# Altium PCB AdapterBoard.PcbDoc
Units mm, origin at the board's own origin, x right, y up, seen from the top; angles counter-clockwise.
Board outline 30.99 x 32.26 mm, 4 copper layers (Top Layer, Layer 1, Layer 2, Bottom Layer), stack 0.603 mm thick; 3 components, 26 nets, 84 pads, 92 vias.
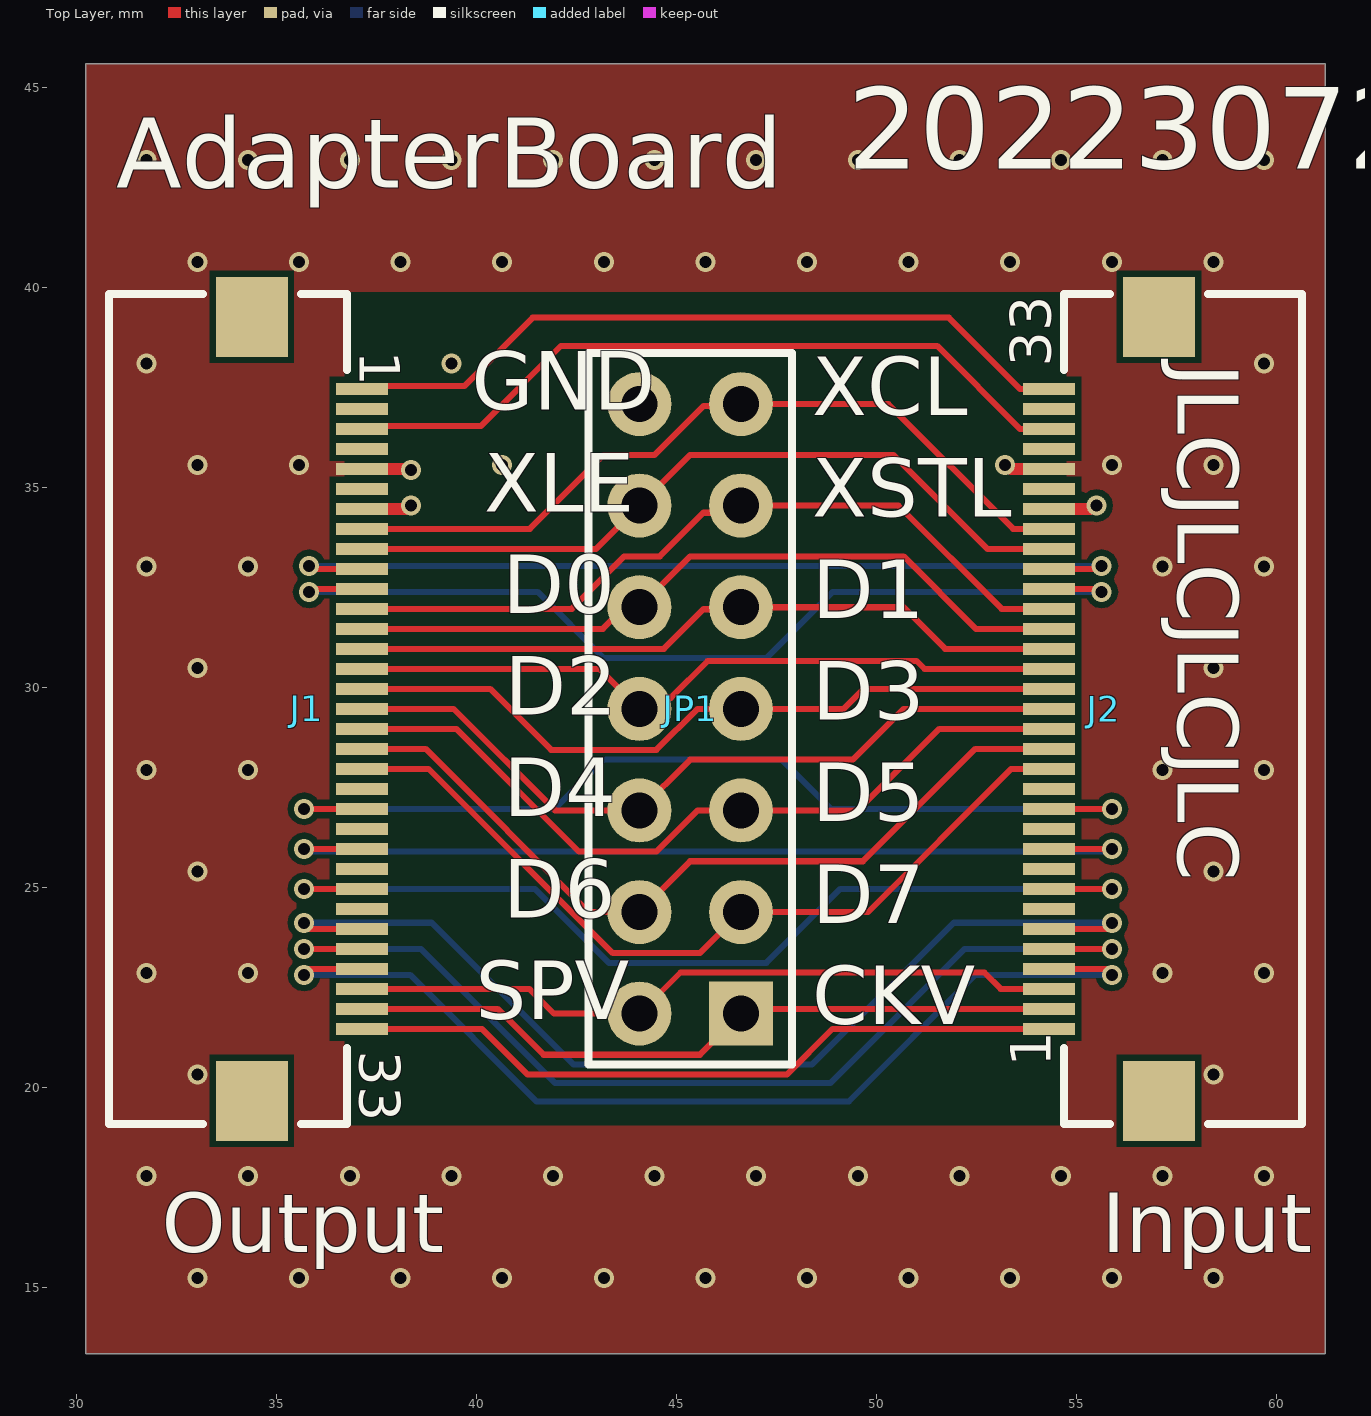
[diagram p0: Top Layer view]
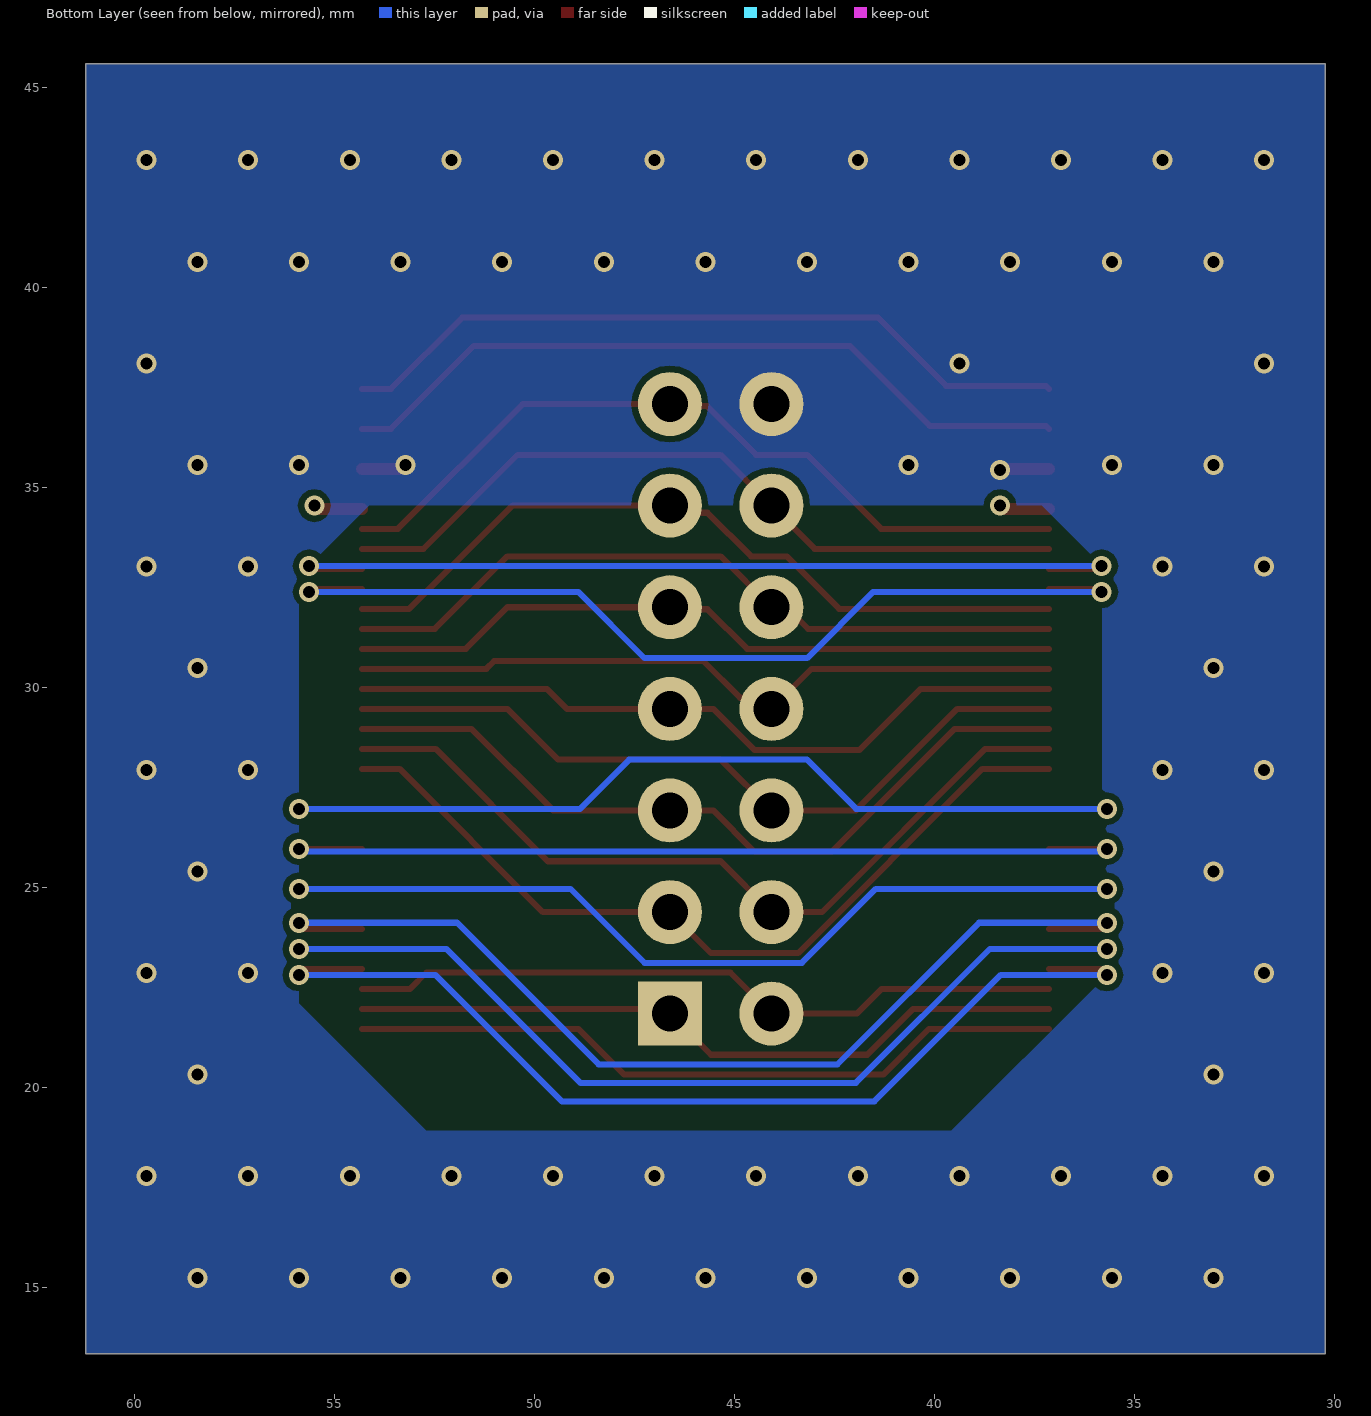
[diagram p1: Bottom Layer view, seen from below]
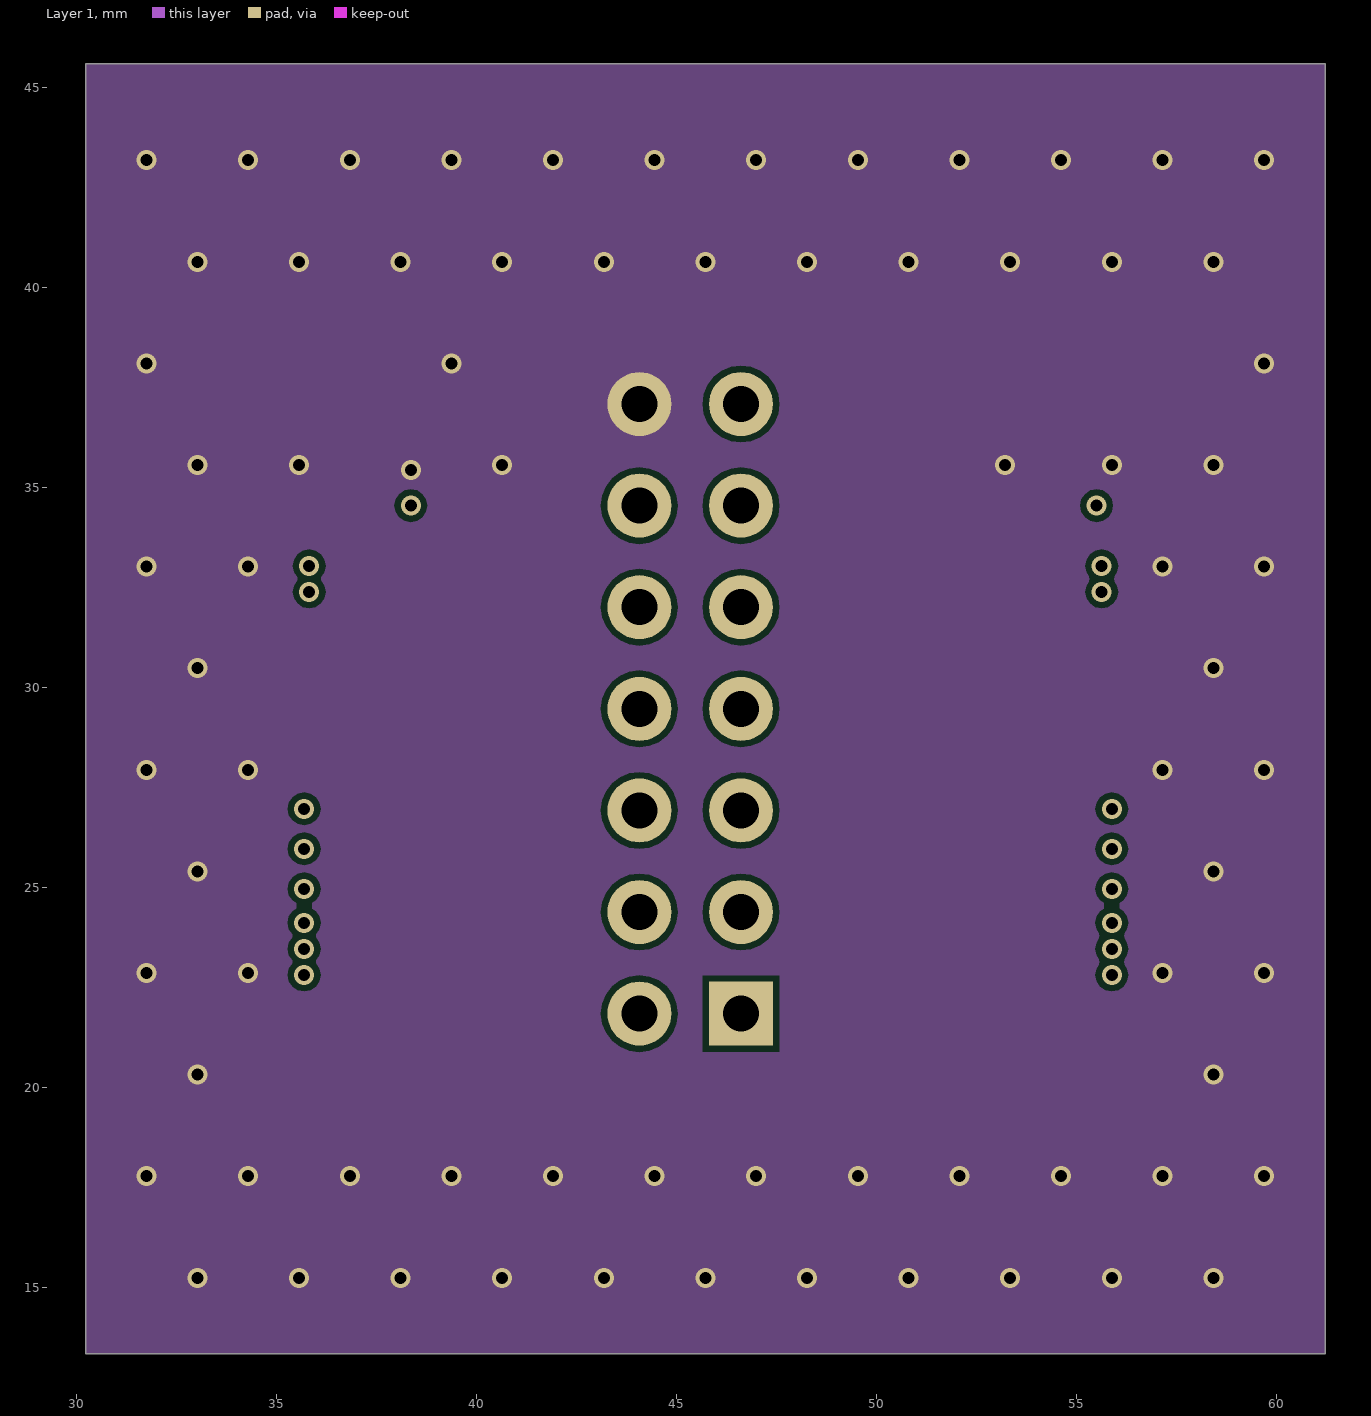
[diagram p2: Layer 1]
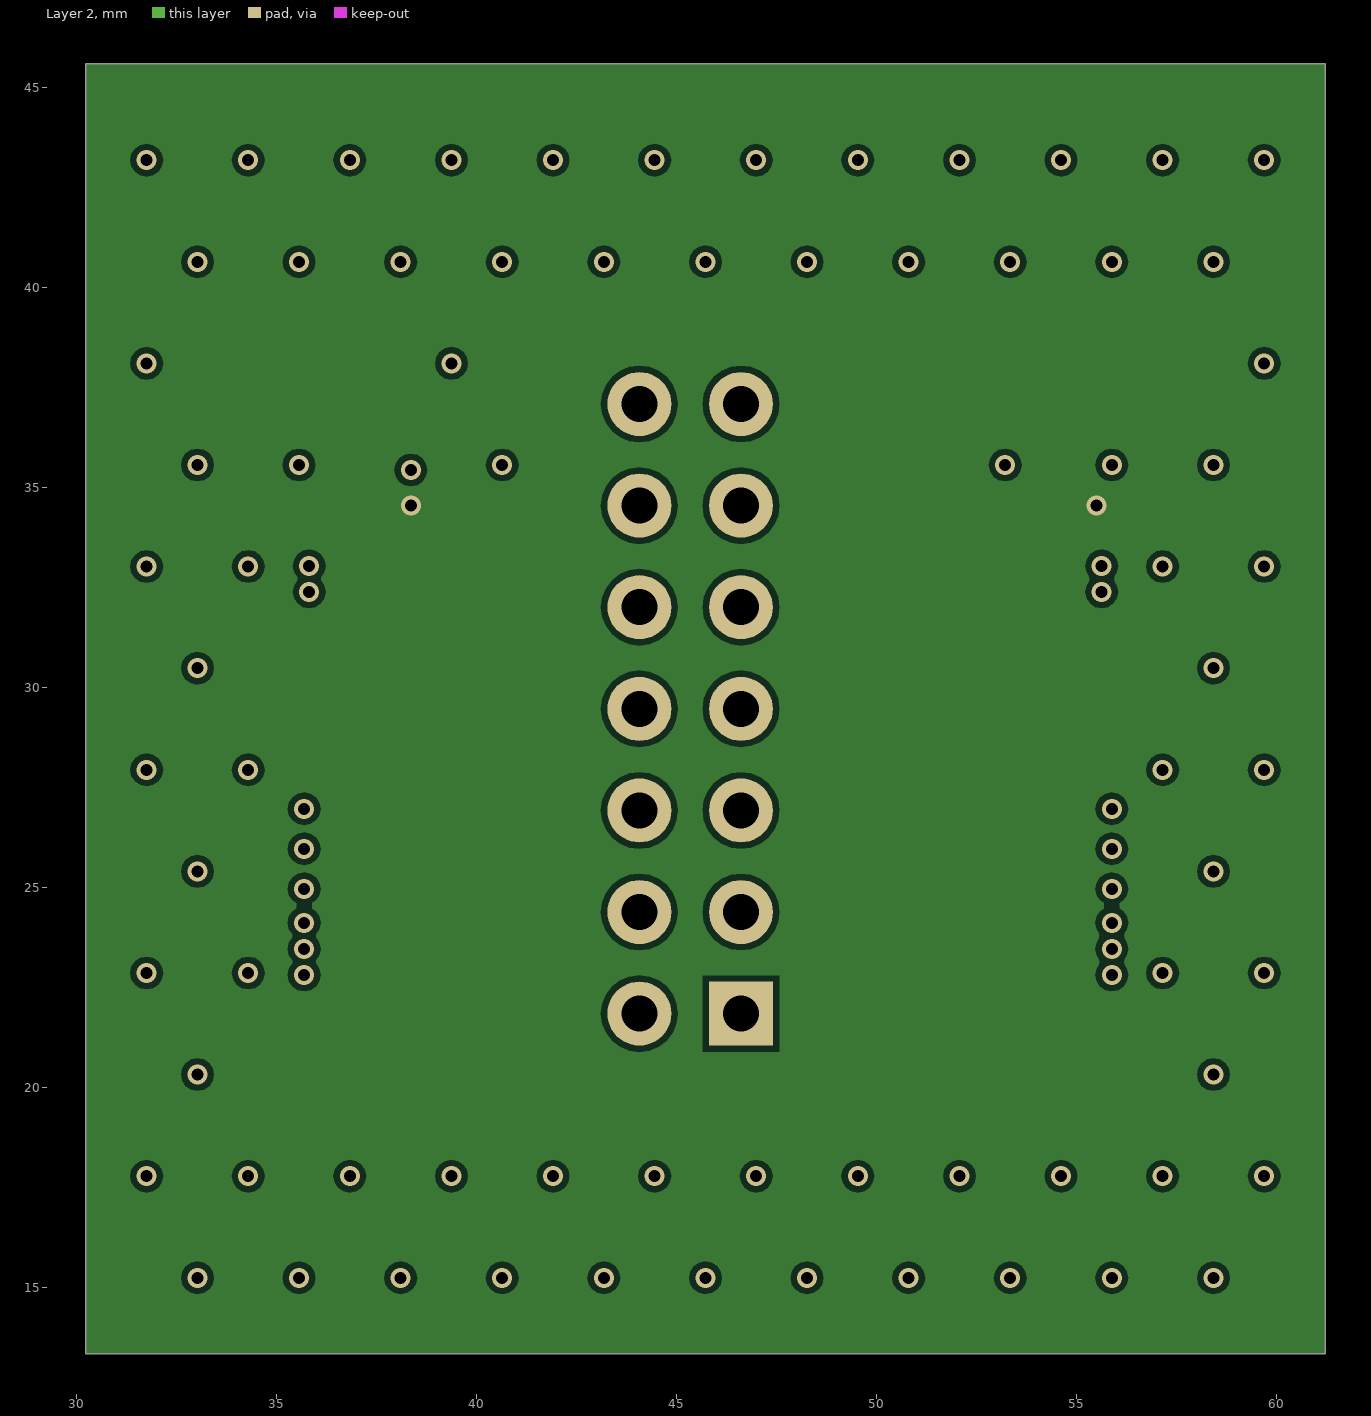
[diagram p3: Layer 2]

## Layer stack, top to bottom
Top Solder: solder mask 0.0102, Solder Resist, Dk 3.5
Top Layer: signal copper 0.0356
Dielectric 2: prepreg 0.0711, PP-006, Dk 4.1
Layer 1: signal copper 0.035
Dielectric 1: dielectric 0.32, FR-4, Dk 4.8
Layer 2: signal copper 0.035
Dielectric 3: prepreg 0.0711, PP-006, Dk 4.1
Bottom Layer: signal copper 0.0356
Bottom Solder: solder mask 0.0102, Solder Resist, Dk 3.5

## Board outline
30.226,13.335 61.214,13.335 61.214,45.593 30.226,45.593

## Design rules (kind name [scope] priority, off if disabled: settings)
Clearance [All] p1: gap=0.152 ignorepadtopadclearanceinfootprint=FALSE
HoleToHoleClearance [All] p1: gap=0.127 allowstackedmicrovias=TRUE
MinimumSolderMaskSliver [All] p1: minsoldermaskwidth=0
PlaneClearance [All] p1: clearance=0.254
PlaneConnect [All] p1: planeconnectstyle=Direct reliefexpansion=0.508 reliefentries=4 reliefconductorwidth=0.254 reliefairgap=0.254
PolygonConnect [All] p1: connectstyle=Direct reliefconductorwidth=0.254 reliefentries=4 polygonreliefangle="90 Angle" airgapwidth=0.254
RoutingVias [All] p1: holewidth=0.3 width=0.5 viastyle="Through Hole" minholewidth=0.3 minwidth=0.5 maxholewidth=9 maxwidth=10
SilkToSilkClearance [All] p1: silktosilkclearance=0
SilkToSolderMaskClearance [IsPad] p1: minsilkscreentomaskgap=0 clearancetoexposedcopper=TRUE
SolderMaskExpansion [All] p1: expansion=0 istentingtop=FALSE
Width [All] p1: maxlimit=2.54 minlimit=0.127 preferedwidth=0.127
24 further rules are at their usual default settings.

## Components (designator, comment, footprint, x,y, rotation, side; value= is the part's Value field where it differs from the comment)
J1 "687133149022" 687133149022 33.782,29.464 r270 top
J2 "687133149022" 687133149022 57.658,29.464 r90 top
JP1 "Header 2X7" HDR2.54-LI-2x7P 45.339,29.464 r90 top

## Footprints (in the part's own frame and the unit in brackets; to place one, negate y for a bottom-side part, rotate by r counter-clockwise, add the part's x,y. Pads: shape width x height; smd on the part's side, far side on the other; paste and mask are expansions set on the pad)
687133149022 [mm] "0.50mm SMT ZIF Horizontal Hinge Type Bottom Contact, 33p"
  rect 0.3x1.3 smd: 1(-8,3.35) 2(-7.5,3.35) 3(-7,3.35) 4(-6.5,3.35) 5(-6,3.35) 6(-5.5,3.35) 7(-5,3.35) 8(-4.5,3.35) 9(-4,3.35) 10(-3.5,3.35) 11(-3,3.35) 12(-2.5,3.35) 13(-2,3.35) 14(-1.5,3.35) 15(-1,3.35) 16(-0.5,3.35) 17(0,3.35) 18(0.5,3.35) 19(1,3.35) 20(1.5,3.35) 21(2,3.35) 22(2.5,3.35) 23(3,3.35) 24(3.5,3.35) 25(4,3.35) 26(4.5,3.35) 27(5,3.35) 28(5.5,3.35) 29(6,3.35) 30(6.5,3.35) 31(7,3.35) 32(7.5,3.35) 33(8,3.35)
  rect 2x1.8 smd: MP1(-9.8,0.6) MP2(9.8,0.6)
  silkscreen extent -10.37,-2.98 10.38,2.98, body extent -10.3,-2.9 10.3,3.6, height 2.25
HDR2.54-LI-2x7P [mm] "双排排针，7x2脚"
  rect 1.6x1.6 hole 0.9: 1(-7.62,-1.27)
  round 1.6 hole 0.9: 2(-7.62,1.27) 3(-5.08,-1.27) 4(-5.08,1.27) 5(-2.54,-1.27) 6(-2.54,1.27) 7(0,-1.27) 8(0,1.27) 9(2.54,-1.27) 10(2.54,1.27) 11(5.08,-1.27) 12(5.08,1.27) 13(7.62,-1.27) 14(7.62,1.27)
  silkscreen extent -8.89,-2.54 8.89,2.54, body extent -8.89,-2.54 8.89,2.54, height 8.5

## Part data
J1 J2: library part CMP-1502-01638-1, "SMT ZIF Connectors Hinge Type WR-FPC, Horizontal, Bottom Contact, pitch 0.5 mm, 33 pins", Contact Resistance=50mOhm, Manufacturer="Wurth Elektronik", Operating Temperature=-40to105degC, Rated Current=0.5A, Withstanding Voltage=150VAC, Working Voltage=50VAC, Contact Design=BottomContact, Datasheet URL=https://katalog.we-online.de/em/datasheet/687133149022.pdf, Manufacturer URL=http://www.we-online.de, Mounting Technology=SMT, Orientation=Horizontal, Package Reference=687133149022, Packaging=TapeandReel, Part Number=687133149022, Pin Number=33, Pitch=0.5mm, Publisher=WurthElektronik
JP1: library part "Header 7X2", "7*2P接插件", BOM名称=7*2P接插件, 封装库来自淘宝卖家 ID：黄晶宝石=其他店铺购入均为盗版假冒封装库, 联系卖家，免费查找封装=唯一出售店铺网址https://shop463601444.taobao.com

## Via types
v1: diameter 0.5, hole 0.3, Top Layer to Bottom Layer, tented both sides, 92 vias

## Nets (pads, with @x,y where several pads share a name; then routed paths per layer and width w, separated by ;. In a path a pad name is that pad's centre, name@x,y a point inside that pad or via, vN(x,y) a via of type N, cw(c..) or ccw(c..) an arc to the next point about the centre after c; other vN are vias at no path point)
CKV: J1.32 J2.2 JP1.1 | length 18.1
  Top Layer w0.152: J1.32 40.526,21.964 41.674,20.816 45.581,20.816 46.729,21.964 J2.2
D0: J1.13 J2.21 JP1.10 | length 18.7
  Top Layer w0.152: J1.13 43.155,31.464 43.695,32.004 JP1.10 45.339,33.274 50.673,33.274 52.483,31.464 J2.21
D1: J1.14 J2.20 JP1.9 | length 18
  Top Layer w0.152: J1.14 44.68,30.964 45.67,31.954 46.559,31.954 JP1.9 50.673,32.004 51.713,30.964 J2.20
D2: J1.15 J2.19 JP1.8 | length 18.2
  Top Layer w0.152: J1.15 43.069,30.464 JP1.8 44.346,29.741 44.854,29.741 45.773,30.66 51.001,30.66 51.197,30.464 J2.19
D3: J1.16 J2.18 JP1.7 | length 18.4
  Top Layer w0.152: J1.16 40.336,29.964 41.864,28.436 44.495,28.436 45.523,29.464 JP1.7 49.183,29.464 49.683,29.964 J2.18
D4: J1.17 J2.17 JP1.6 | length 19.3
  Top Layer w0.152: J1.17 39.422,29.464 41.962,26.924 JP1.6 45.339,28.194 49.403,28.194 50.673,29.464 J2.17
D5: J1.18 J2.16 JP1.5 | length 19.7
  Top Layer w0.152: J1.18 39.492,28.964 42.56,25.896 44.495,25.896 45.523,26.924 JP1.5 49.53,26.924 51.57,28.964 J2.16
D6: J1.19 J2.15 JP1.4 | length 20.6
  Top Layer w0.152: J1.19 38.726,28.464 42.806,24.384 JP1.4 45.339,25.654 49.657,25.654 52.467,28.464 J2.15
D7: J1.20 J2.14 JP1.3 | length 21
  Top Layer w0.152: J1.20 38.796,27.964 43.404,23.356 45.581,23.356 JP1.3 49.784,24.384 53.364,27.964 J2.14
GND: J1.5 J2.29 JP1.14 | length 2.4
  Top Layer w0.3: J1.5 38.323,35.464 v1(38.354,35.433) ; v1(53.213,35.56) 53.267,35.56 53.363,35.464 J2.29
  other v1: 33.02,15.24 35.56,15.24 38.1,15.24 40.64,15.24 43.18,15.24 45.72,15.24 48.26,15.24 50.8,15.24 53.34,15.24 55.88,15.24 58.42,15.24 31.75,17.78 34.29,17.78 36.83,17.78 39.37,17.78 41.91,17.78 44.45,17.78 46.99,17.78 49.53,17.78 52.07,17.78 54.61,17.78 57.15,17.78 59.69,17.78 33.02,20.32 58.42,20.32 31.75,22.86 34.29,22.86 57.15,22.86 59.69,22.86 33.02,25.4 58.42,25.4 31.75,27.94 34.29,27.94 57.15,27.94 59.69,27.94 33.02,30.48 58.42,30.48 31.75,33.02 34.29,33.02 57.15,33.02 59.69,33.02 33.02,35.56 35.56,35.56 40.64,35.56 55.88,35.56 58.42,35.56 31.75,38.1 39.37,38.1 59.69,38.1 33.02,40.64 35.56,40.64 38.1,40.64 40.64,40.64 43.18,40.64 45.72,40.64 48.26,40.64 50.8,40.64 53.34,40.64 55.88,40.64 58.42,40.64 31.75,43.18 34.29,43.18 36.83,43.18 39.37,43.18 41.91,43.18 44.45,43.18 46.99,43.18 49.53,43.18 52.07,43.18 54.61,43.18 57.15,43.18 59.69,43.18
NetJ1_1: J1.1 J2.33 | length 18.6
  Top Layer w0.152: J1.1 37.208,37.54 39.699,37.54 41.402,39.243 51.803,39.243 53.582,37.464 J2.33
NetJ1_3: J1.3 J2.31 | length 18.9
  Top Layer w0.152: J1.3 37.208,36.54 40.113,36.54 42.109,38.536 51.51,38.536 53.582,36.464 J2.31
NetJ1_10: J1.10 J2.24 | length 22.5
  Top Layer w0.152: v1(35.814,33.04) 35.89,32.964 J1.10 ; J2.24 55.55,32.964 v1(55.626,33.04)
  Bottom Layer w0.152: v1(35.814,33.04) 43.221,33.04 ; 43.221,33.04 v1(55.626,33.04)
NetJ1_11: J1.11 J2.23 | length 23.9
  Top Layer w0.152: v1(35.814,32.388) 35.89,32.464 J1.11 ; J2.23 55.55,32.464 v1(55.626,32.388)
  Bottom Layer w0.152: v1(35.814,32.388) 41.526,32.388 43.18,30.734 47.244,30.734 48.898,32.388 v1(55.626,32.388)
NetJ1_22: J1.22 J2.12 | length 24.2
  Top Layer w0.152: v1(35.687,26.964) J1.22 ; J2.12 v1(55.88,26.964)
  Bottom Layer w0.152: v1(35.687,26.964) 41.95,26.964 43.18,28.194 47.625,28.194 48.855,26.964 v1(55.88,26.964)
NetJ1_24: J1.24 J2.10 | length 23.3
  Top Layer w0.152: v1(35.687,25.964) 36.406,25.964 J1.24 ; J2.10 v1(55.88,25.964)
  Bottom Layer w0.152: v1(35.687,25.964) 35.755,25.896 55.812,25.896 v1(55.88,25.964)
NetJ1_26: J1.26 J2.8 | length 24.7
  Top Layer w0.152: v1(35.687,24.964) 36.406,24.964 J1.26 ; J2.8 v1(55.88,24.964)
  Bottom Layer w0.152: v1(35.687,24.964) 41.457,24.964 43.307,23.114 47.244,23.114 49.094,24.964 v1(55.88,24.964)
NetJ1_28: J1.28 J2.6 | length 26.3
  Top Layer w0.152: v1(35.687,24.116) 35.839,23.964 J1.28 ; J2.6 55.728,23.964 v1(55.88,24.116)
  Bottom Layer w0.152: v1(35.687,24.116) 38.876,24.116 42.418,20.574 48.387,20.574 51.929,24.116 v1(55.88,24.116)
NetJ1_29: J1.29 J2.5 | length 26
  Top Layer w0.152: v1(35.687,23.464) J1.29 ; J2.5 v1(55.88,23.464)
  Bottom Layer w0.152: v1(35.687,23.464) 38.606,23.464 41.957,20.113 48.848,20.113 52.199,23.464 v1(55.88,23.464)
NetJ1_30: J1.30 J2.4 | length 26
  Top Layer w0.152: v1(35.687,22.812) 35.839,22.964 J1.30 ; J2.4 55.728,22.964 v1(55.88,22.812)
  Bottom Layer w0.152: v1(35.687,22.812) 38.336,22.812 41.496,19.652 49.309,19.652 52.469,22.812 v1(55.88,22.812)
NetJ1_33: J1.33 J2.1 | length 18.1
  Top Layer w0.152: J1.33 40.131,21.464 41.275,20.32 47.752,20.32 48.896,21.464 J2.1
SPV: J1.31 J2.3 JP1.2 | length 18
  Top Layer w0.152: J1.31 41.315,22.464 41.935,21.844 JP1.2 45.097,22.872 52.693,22.872 53.101,22.464 J2.3
VCC: J1.7 J2.27 | length 2.5
  Top Layer w0.3: J1.7 38.22,34.464 38.3,34.544 v1(38.354,34.544) ; J2.27 55.365,34.464 55.445,34.544 v1(55.499,34.544)
XCL: J1.8 J2.26 JP1.13 | length 19.8
  Top Layer w0.152: J1.8 41.33,33.964 43.18,35.814 44.45,35.814 45.67,37.034 46.559,37.034 JP1.13 50.292,37.084 53.412,33.964 J2.26
XLE: J1.9 J2.25 JP1.12 | length 19.1
  Top Layer w0.152: J1.9 42.989,33.464 JP1.12 45.339,35.814 50.419,35.814 52.769,33.464 J2.25
XSTL: J1.12 J2.22 JP1.11 | length 19.3
  Top Layer w0.152: J1.12 42.378,31.964 43.688,33.274 44.577,33.274 45.67,34.367 46.432,34.367 JP1.11 50.546,34.544 53.126,31.964 J2.22
pads on no net: J1.2 J1.4 J1.6 J1.21 J1.23 J1.25 J1.27 J1.MP1 J1.MP2 J2.7 J2.9 J2.11 J2.13 J2.28 J2.30 J2.32 J2.MP1 J2.MP2

## Polygon pours and split planes (outlines as drawn)
GND on Layer 1 "GND_L02_P000" (solid, remove dead copper, pour order 0): 30.226,13.335 61.214,13.335 61.214,45.593 30.226,45.593
VCC on Layer 2 "VCC_L03_P001" (solid, remove dead copper, pour order 1): 30.226,13.335 61.214,13.335 61.214,45.593 30.226,45.593
GND on Top Layer "GND_L01_P002" (solid, remove dead copper, pour order 2): 30.226,13.335 61.214,13.335 61.214,45.593 30.226,45.593
GND on Bottom Layer "GND_L04_P003" (solid, remove dead copper, pour order 3): 30.226,13.335 61.214,13.335 61.214,45.593 30.226,45.593

## Other copper
Top Layer:
  pour cut-out: 36.703,19.05 54.737,19.05 54.737,39.878 36.703,39.878
Bottom Layer:
  pour cut-out: 35.814,33.04 37.318,34.544 54.122,34.544 55.88,32.786 55.88,22.098 52.705,18.923 39.576,18.923 35.687,22.812 35.814,22.939

## Silkscreen, mask and mechanical layers (free items; w line width, h text height)
Top Overlay:
  text "202230725" at 49.276,42.291 h3.5
  text "AdapterBoard" at 30.988,41.91 h3
  text "JLCJLCJLCJLC" at 57.531,38.1 h1.52 r270
  text "GND" at 39.878,36.449 h2.5
  text "XCL" at 48.387,36.322 h2.5
  text "XLE" at 40.184,33.909 h2.5
  text "XSTL" at 48.387,33.782 h2.5
  text "D0" at 40.655,31.369 h2.5
  text "D1" at 48.387,31.242 h2.5
  text "D2" at 40.702,28.829 h2.5
  text "D3" at 48.387,28.702 h2.5
  text "D4" at 40.678,26.289 h2.5
  text "D5" at 48.387,26.162 h2.5
  text "D6" at 40.671,23.749 h2.5
  text "D7" at 48.387,23.622 h2.5
  text "SPV" at 39.974,21.214 h2.5
  text "CKV" at 48.387,21.087 h2.5
  text "Output" at 32.131,15.393 h2.54
  text "Input" at 55.626,15.393 h2.54
Mechanical 1:
  lines w0.152: 30.226,13.335 30.226,45.593 61.214,45.593 61.214,22.225 61.214,13.335 30.226,13.335

## Text inside footprints (layer, text, board x,y; h text height)
J1: Top Overlay "1" at 37.082,38.414 h1.02 r270; Top Overlay "33" at 37.082,20.914 h1.02 r270
J2: Top Overlay "1" at 54.358,20.514 h1.02 r90; Top Overlay "33" at 54.358,38.014 h1.02 r90